# Altium PCB Copy of RT_SUPER_MK842.PCBdoc (part 3 of 3)
Units mil, origin at the board's own origin, x right, y up, seen from the top; angles counter-clockwise.
Board outline 1499.94 x 1499.94 mil, 4 copper layers (Top Layer, GND, PWR, Bottom Layer), stack 39.556 mil thick; 179 components, 119 nets, 506 pads, 207 vias.
Unrouted connection lines stored in the file: 7.
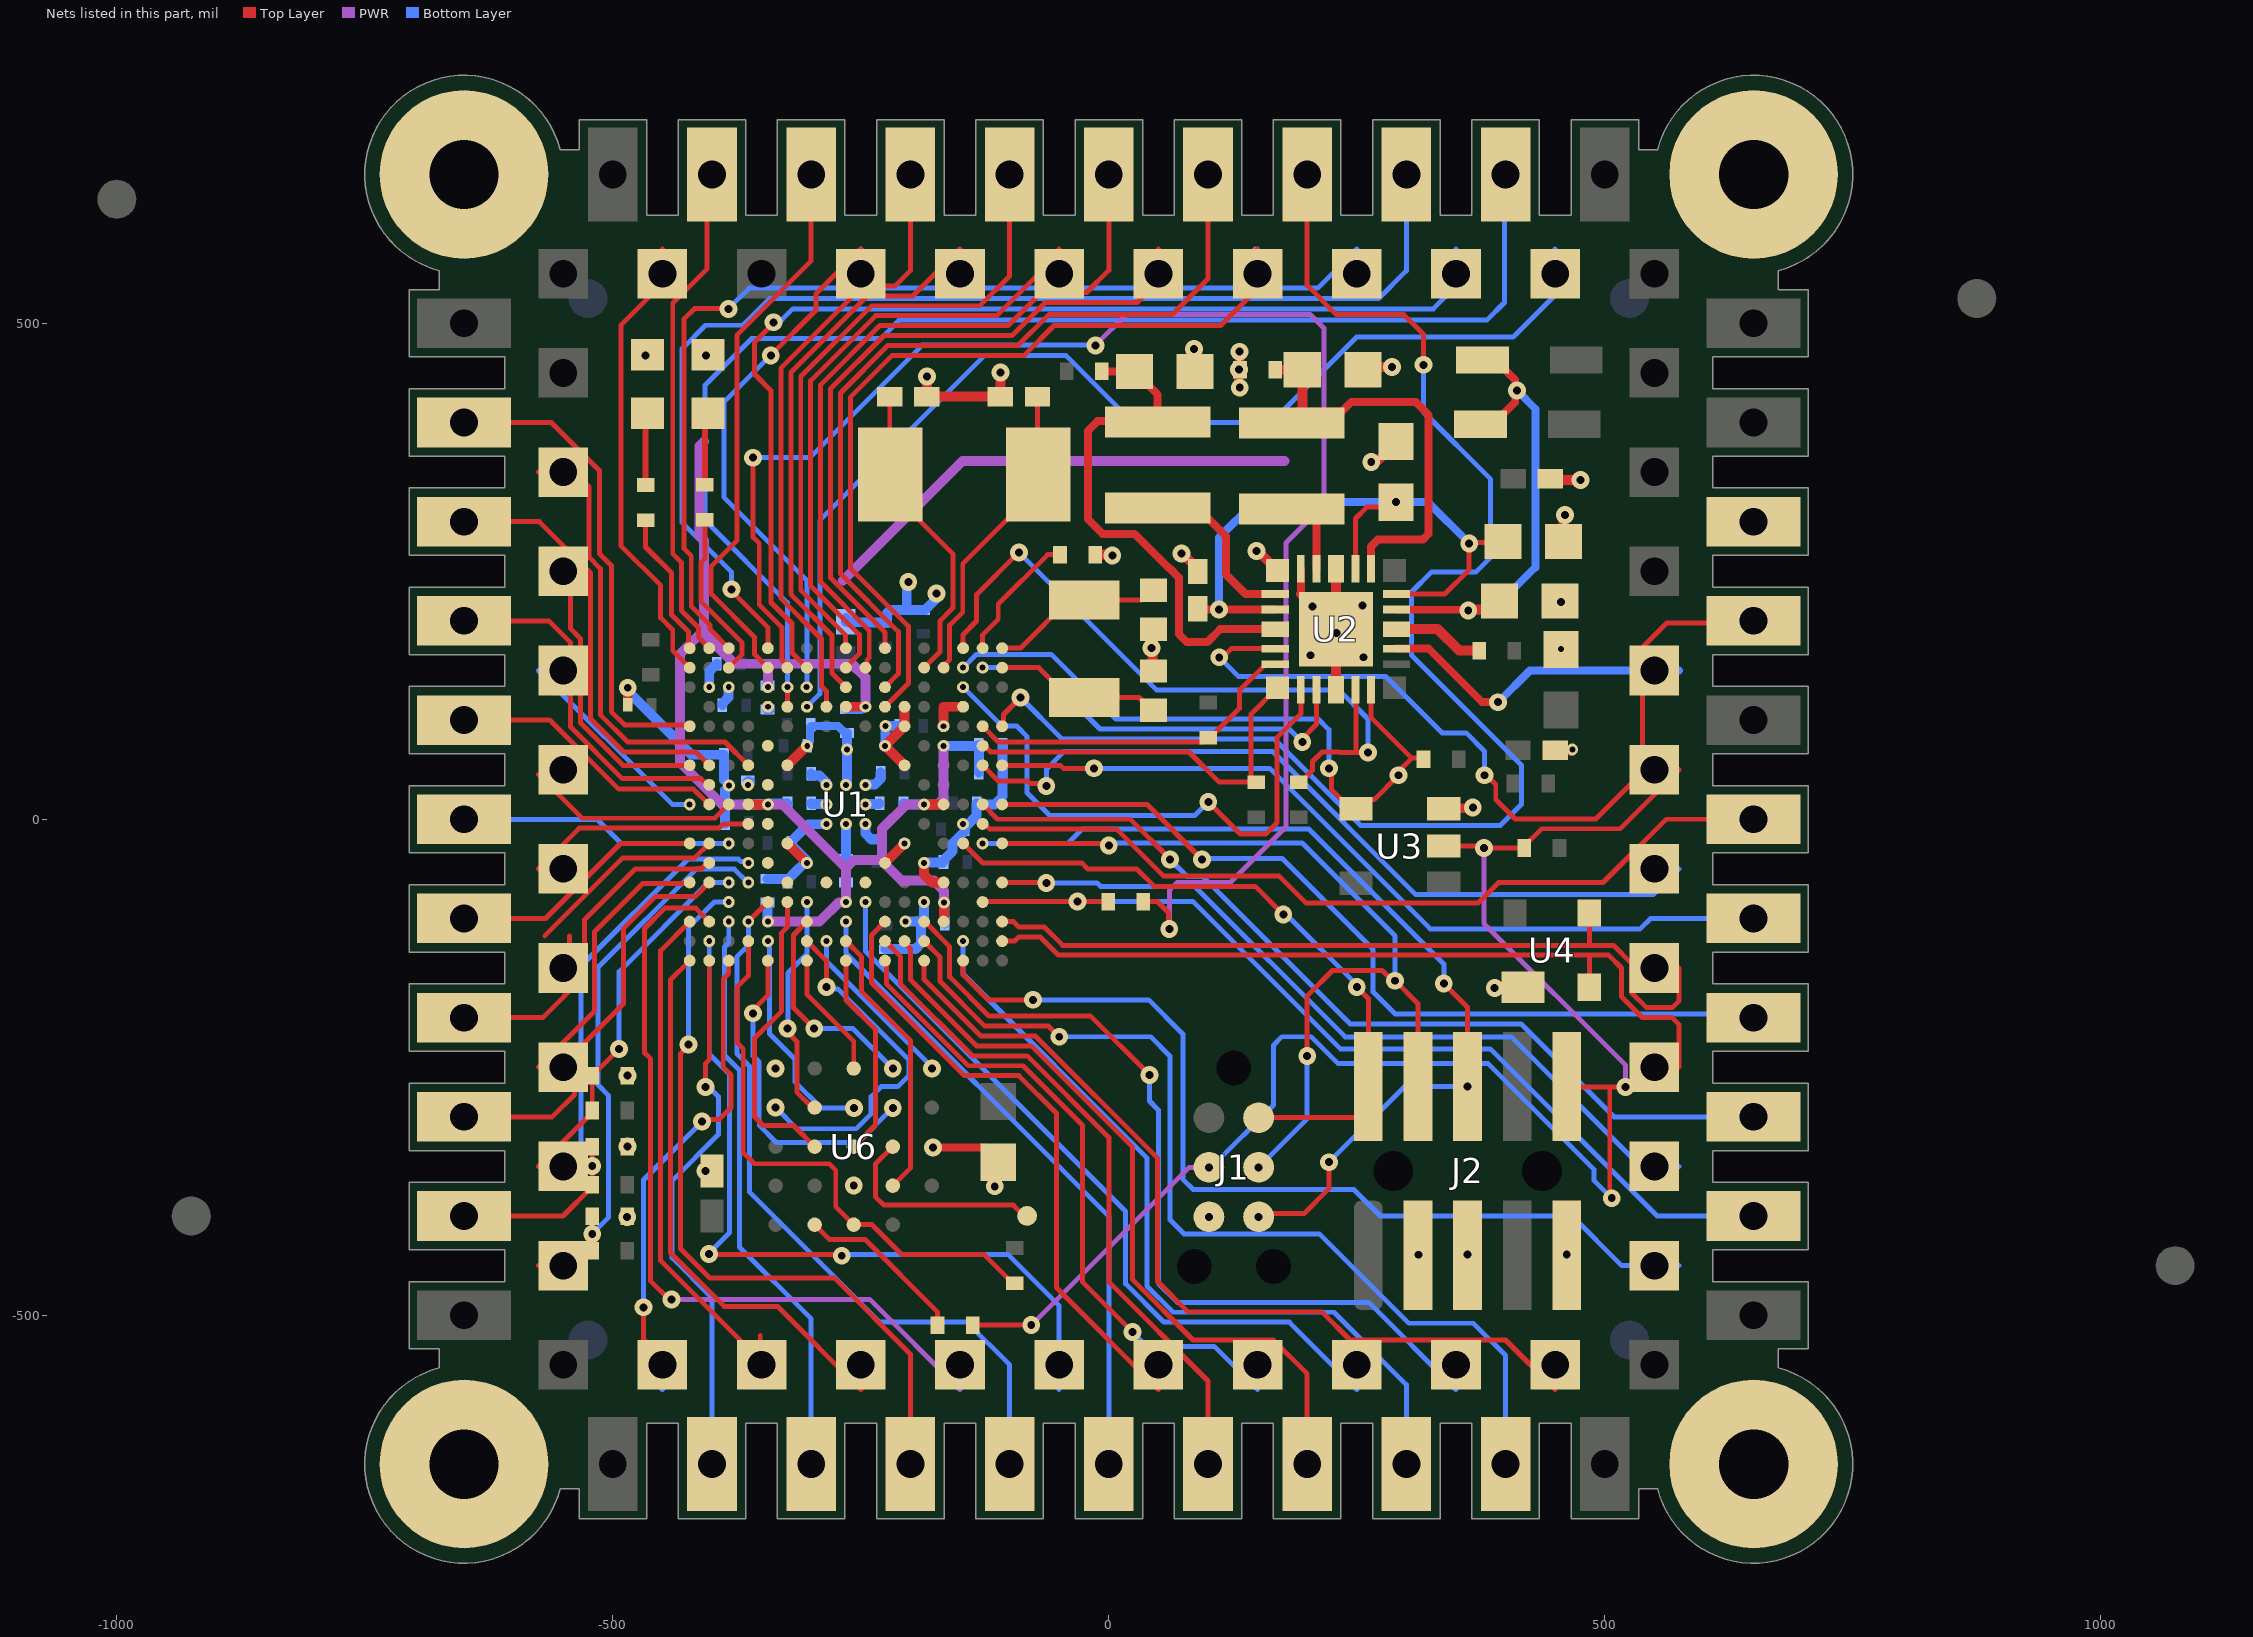
[diagram p4: the nets of this part, all layers, seen from the top]

## Via types
v1: diameter 18, hole 8, Top Layer to Bottom Layer, tented both sides, 124 vias
v2: diameter 12, hole 6, Top Layer to Bottom Layer, tented both sides, 83 vias

## Nets (pads, with @x,y where several pads share a name; then routed paths per layer and width w, separated by ;. In a path a pad name is that pad's centre, name@x,y a point inside that pad or via, vN(x,y) a via of type N, cw(c..) or ccw(c..) an arc to the next point about the centre after c; other vN are vias at no path point) (continued)
ADC0_3: T75.1 U1.A2 | length 534.2
  Top Layer w5: U1.A2@-402.8,172.48 -413.82,183.5 -413.82,193.36 -430.91,210.46 -430.91,258.96 -439.59,267.63 -439.59,520.41 -404.93,555.07 -404.93,670.07 T75.1@-400,675
ADC0_4: T73.1 U1.B5 | length 587.7
  Top Layer w5: U1.B5@-343.74,152.8 -357.24,166.3 -357.24,183.63 -400.91,227.3 -400.91,254.91 -375,280.82 -375,488 -300,563 T73.1@-300,675
ADC0_8: T2.1 U1.E1 | length 514.6
  Top Layer w5: T2.1@-672,400 -562.03,400 -513.38,351.35 -513.38,335.88 -513.38,267.66 -501.47,255.75 -501.47,108.51 -488.03,95.08 -423.82,95.08 U1.E1@-422.48,93.74
  Top Layer w6: T2.1@-675,400 T2.1@-672,400
ADC0_12: T76.1 U1.B1 | length 468.3
  Top Layer w5: -450,575 -450,540 -491.88,498.12 -491.88,275.86 -451.84,235.82 -451.84,203.1 -439.59,190.85 -439.59,169.9 U1.B1@-422.48,152.8
DM_MCU: T43.1 U1.T17 U4.2 | length 813.6
  Top Layer w5: U1.T17@-107.52,-122.8 -94.78,-122.8 -90.63,-118.65 -69.07,-118.65 -50.65,-137.07 482.78,-137.07 ; U4.2@484.37,-169.37 484.37,-138.67 482.78,-137.07 ; 575,-250 575,-207.1 567.9,-200 538,-200 516.79,-178.79 516.79,-150 503.86,-137.07 482.78,-137.07
DP_MCU: T45.1 U1.R17 U4.3 | length 804.1
  Top Layer w5: U1.R17@-107.52,-103.11 -96.18,-103.11 -90.63,-108.65 -64.93,-108.65 -46.51,-127.07 484.37,-127.07 ; U4.3@484.37,-94.56 484.37,-127.07 ; 575,-150 575,-182.9 567.9,-190 542.14,-190 526.79,-174.64 526.79,-145.14 508.72,-127.07 484.37,-127.07
FC0_CLK: T5.1 U1.G1 | length 304.2
  Top Layer w5: T5.1@-564.71,250 -542.5,227.79 -542.5,192.12 -532.5,182.12 -532.5,97.12 -489.75,54.37 U1.G1@-422.48,54.37 ; T5.1@-550,250 T5.1@-539.71,250
FC0_RXD: T3.1 U1.G4 | length 462
  Top Layer w5: T3.1@-575,350 -538.69,350 -523.88,335.18 -523.88,264.02 -512.5,252.64 -512.5,105.4 -484.97,77.87 -386.93,77.87 U1.G4@-363.43,54.37
FC0_SSEL0: T6.1 U1.H2 | length 390.5
  Top Layer w5: T6.1@-675,200 -564.53,200 -542.5,177.97 -542.5,92.98 -490.39,40.87 -410.87,40.87 -404.69,34.68 U1.H2@-402.8,34.68
FC0_SSEL1: T7.1 U1.J1 | length 208.4
  Bottom Layer w5: T7.1@-575,150 -440,15 v2(-422.48,15)
FC0_TXD: T4.1 U1.G2 | length 460.2
  Top Layer w5: T4.1@-675,300 -574,300 -522.5,248.5 -522.5,101.26 -489.11,67.87 -416.3,67.87 U1.G2@-402.8,54.37
FC1_CLK: T8.1 U1.J2 | length 307.4
  Top Layer w5: T8.1@-675,100 -563.66,100 -493.93,30.27 -418.66,30.27 -403.39,15 U1.J2@-402.8,15
FC1_RXD: T10.1 U1.L3 | length 302
  Bottom Layer w5: T10.1@-675,0 -674.52,-0.48 -515.48,-0.48 -491.59,-24.37 v2(-383.11,-24.37)
FC1_SSEL0: T9.1 U1.J3 | length 220.7
  Top Layer w5: T9.1@-575,45.31 -530.69,1 -397.11,1 U1.J3@-383.11,15 ; T9.1@-550,45.31 T9.1@-550,50
FC1_SSEL1: T12.1 U1.L1 | length 283.8
  Top Layer w5: T12.1@-675,-100 -567.83,-100 -492.2,-24.37 U1.L1@-422.48,-24.37
FC1_TXD: T11.1 U1.K4 | length 230.3
  Top Layer w5: T11.1@-575,-50 -534,-9 -392.97,-9 -388.65,-4.69 U1.K4@-363.43,-4.69
FC2_CLK: T62.1 U1.A3 | length 1058.5
  Top Layer w5: v1(-383.49,514.48) -383.93,514.92 -417.55,514.92 -428.37,504.1 -428.37,273.08 -420.91,265.63 -420.91,214.6 -402.02,195.71 -402.02,191.39 U1.A3@-383.11,172.48
  Bottom Layer w5: v1(-383.49,514.48) -362.5,535.47 210.47,535.47 250,575
FC2_SDA: T59.1 U1.D6 | length 1353.5
  Top Layer w5: U1.D6@-324.06,113.43 v2(-324.06,133.11)
  Bottom Layer w5: v2(-324.06,133.11) -324.06,218.4 -407.03,301.37 -407.03,437.61 -360.16,484.49 -229.94,484.49 -210.96,503.48 381.34,503.48 398.84,520.98 398.84,673.84 T59.1@400,675
FC2_SSEL0: T58.1 U1.D7 | length 1131.5
  Bottom Layer w5: v2(-304.37,113.43) -291.34,126.46 -291.34,301.34 -125,467.68 -43.24,467.68 24.68,399.76 163.48,399.76 249.72,486 407.53,486 450,528.47 450,575
FC2_SSEL1: T60.1 U1.B7 | length 1118.8
  Top Layer w5: v1(-337.96,500.99) -337.96,500.08 -357.24,480.8 -357.24,448.82 -340.53,432.11 -340.53,218.52 -319.3,197.29 -319.3,167.73 U1.B7@-304.37,152.8
  Bottom Layer w5: v1(-337.96,500.99) -335.48,503.48 -329.54,503.48 -318.54,514.48 327.2,514.48 350,537.28 350,575
FC2_WS: T61.1 U1.A5 | length 1222.5
  Top Layer w5: v1(-380.53,231.81) -380.53,230.23 -343.74,193.44 U1.A5@-343.74,172.48
  Bottom Layer w5: v1(-380.53,231.81) -380.53,249.39 -430.13,298.98 -430.13,474.48 -406.62,497.98 -368.92,497.98 -341.9,525 272.1,525 300,552.9 T61.1@300,675
FC3_CLK: T72.1 U1.C7 | length 545.1
  Top Layer w5: v1(-340.74,467.68) -295.1,513.32 -295.1,529.9 -250,575
  Bottom Layer w5: v1(-340.74,467.68) -388,420.42 -388,324.73 -304.37,241.1 -304.37,133.58 v2(-304.84,133.11) ; T72.1@-257.95,567.05 -250,575
FC3_SDA: T70.1 U1.C9 | length 562.4
  Top Layer w5: U1.C9@-265,133.11 -279,147.11 -279,185.27 -320.53,226.8 -320.53,450.41 -243.26,527.68 -197.32,527.68 -150,575
FC3_SSEL0: T68.1 U1.B9 | length 623.4
  Top Layer w5: U1.B9@-265,152.8 -265,153.39 -251.5,166.89 -251.5,186.06 -300.53,235.09 -300.53,442.13 -234.98,507.68 -112.84,507.68 -50,570.52 -50,575
FC3_SSEL1: T69.1 U1.A9 | length 672.6
  Top Layer w5: U1.A9@-265,172.48 -265.57,173.05 -265.57,185.98 -310.53,230.95 -310.53,446.27 -239.12,517.68 -129.92,517.68 -100,547.6 T69.1@-100,675
FC3_WS: T71.1 U1.D8 | length 653.4
  Top Layer w5: U1.D8@-284.68,113.43 -284.68,129.22 -289.61,134.14 -289.61,181.74 -330.53,222.66 -330.53,454.55 -247.41,537.68 -215.32,537.68 -200,553 T71.1@-200,675
FC4_CLK: T64.1 U1.D11 | length 844.3
  Top Layer w5: U1.D11@-225.63,113.43 -202.13,136.93 -202.13,194.64 -260.53,253.04 -260.53,425.56 -218.41,467.68 -85.18,467.68 -55.18,497.68 112.7,497.68 150,534.98 150,575
  PWR w5: 147.6,575 150,575
FC4_SDA: T65.1 U1.C11 | length 874.7
  Top Layer w5: U1.C11@-225.63,133.11 -212.13,146.61 -212.13,189.11 -270.53,247.51 -270.53,429.7 -222.55,477.68 -91.47,477.68 -60.4,508.74 63.75,508.74 100,544.99 T65.1@100,675
FC4_SSEL0: T66.1 U1.A11 | length 692.2
  Top Layer w5: U1.A11@-225.63,172.48 -225.63,188.47 -280.53,243.37 -280.53,433.84 -226.7,487.68 -97.34,487.68 -64.02,520.99 28.55,520.99 50,542.44 50,575
FC4_SSEL1: T63.1 U1.E17 | length 1485.5
  Top Layer w5: U1.E17@-107.52,93.74 -106.18,95.08 -106.18,105.61 v1(-89.07,122.71) ; T63.1@200,675 200,538.19 229.45,508.74 297.44,508.74 317.27,488.91 v1(317.27,458.13)
  Bottom Layer w5: v1(-89.07,122.71) -47.41,81.06 166.56,81.06 253.7,-6.08 394.93,-6.08 416.01,15 416.01,54.57 305.17,165.41 305.17,229.06 325.49,249.39 370.39,249.39 385,264 385,342.81 317.27,410.54 v1(317.27,458.13)
FC4_WS: T67.1 U1.B10 | length 767
  Top Layer w5: U1.B10@-245.31,152.8 -243.98,154.13 -243.98,160.27 -241.5,162.75 -241.5,190.2 -290.53,239.23 -290.53,437.98 -230.84,497.68 -101.48,497.68 -68.16,530.99 -22.42,530.99 0,553.42 T67.1@0,675
FC5_RXD: T42.1 U1.J16 | length 932.9
  Top Layer w5: U1.J16@-127.2,15 -112.2,0 21.61,0 61.75,-40.14 v1(61.75,-40.51)
  Bottom Layer w5: v1(61.75,-40.51) 79,-57.76 94.73,-57.76 243.3,-206.33 415.66,-206.33 509.33,-300 T42.1@675,-300
FC5_SCK: T47.1 U1.G16 | length 805.8
  Top Layer w5: U1.G16@-127.2,54.37 -111.46,38.62 -82,38.62 -79.32,35.95 -65.49,35.95 v1(-63,33.46)
  Bottom Layer w5: v1(-63,33.46) -62.88,33.58 -62.88,50.36 -44.8,68.44 165.03,68.44 309.48,-76 549,-76 575,-50
FC5_SSEL0: T44.1 U1.J17 | length 897.7
  Top Layer w5: U1.J17@-107.52,15 38.49,15 v1(94,-40.51)
  Bottom Layer w5: v1(94,-40.51) 95.15,-39.37 174.62,-39.37 266.5,-131.25 266.5,-174.21 288.62,-196.33 671.33,-196.33 T44.1@675,-200
FC5_TXD: T46.1 U1.G17 | length 855.2
  Top Layer w5: U1.G17@-107.52,54.37 -48.89,54.37 -45.89,51.37 v1(-15,51.37)
  Bottom Layer w5: v1(-15,51.37) 162.09,51.37 323.96,-110.5 535.74,-110.5 546.24,-100 T46.1@675,-100
FLEXSPI0A_D0: U1.T5 U6.D3 | length 224
  Top Layer w5: U6.D3@-257.13,-290.63 -257.13,-290.87 v1(-257,-291)
  Bottom Layer w5: v2(-343.74,-122.8) -342.4,-124.13 -342.4,-128.83 -342,-129.22 -342,-216.33 -316.13,-242.2 -316.13,-265.07 -290.2,-291 v1(-257,-291)
FLEXSPI0A_D1: U1.U5 U6.D2 | length 331.5
  Top Layer w5: v1(-358.5,-195.63) -358.5,-192.11 -343.74,-177.35 U1.U5@-343.74,-142.48 ; v1(-217.76,-291) U6.D2@-217.76,-290.63
  Bottom Layer w5: v1(-358.5,-195.63) -358.5,-238.51 -352.37,-244.65 -352.37,-308.59 -334.95,-326 -252.76,-326 v1(-217.76,-291)
FLEXSPI0A_D2: U1.P6 U6.C4 | length 303.5
  Top Layer w5: U1.P6@-324.06,-83.43 -324.06,-108.65 -329.8,-114.4 -329.8,-193.47 -357.24,-220.91 -357.24,-299.97 -348.55,-308.65 -317.84,-308.65 U6.C4@-296.5,-330
FLEXSPI0A_D3: U1.P7 U6.D4 | length 228.2
  Top Layer w5: v1(-324,-211) -324,-214.52 -314.44,-224.08 -314.44,-275.13 -298.94,-290.63 U6.D4@-296.5,-290.63
  Bottom Layer w5: v1(-324,-211) -323.43,-210.43 -323.43,-154.82 -304.37,-135.76 v2(-304.37,-83.43)
FLEXSPI0A_D4: U1.T7 U6.D5 | length 359.4
  Top Layer w5: U1.T7@-304.37,-122.8 -284.68,-142.48 v1(-284.68,-169)
  Bottom Layer w5: v1(-335.87,-290.63) -314.51,-311.98 -254.65,-311.98 -239.62,-296.95 -239.62,-279.68 -229.52,-269.58 -212.74,-269.58 -201.26,-258.09 -201.26,-242.99 -273.3,-170.95 -282.74,-170.95 v1(-284.68,-169)
FLEXSPI0A_D5: U1.U7 U6.E3 | length 128.3
  Top Layer w5: U1.U7@-304.37,-142.48 -304.37,-176.52 -257.13,-223.77 U6.E3@-257.13,-251.26
FLEXSPI0A_D6: U1.R7 U6.E2 | length 218
  Top Layer w5: U1.R7@-304.37,-103.11 -317.87,-116.61 -317.87,-190.13 v1(-297,-211)
  Bottom Layer w5: v1(-297,-211) -258.02,-211 v1(-217.76,-251.26)
FLEXSPI0A_D7: U1.T8 U6.E1 | length 174.2
  Top Layer w5: U1.T8@-284.68,-124.69 U1.T8@-284.68,-122.8
  Bottom Layer w5: v2(-284.56,-122.93) -284.56,-143.24 -178.39,-249.41 v1(-178.39,-251.26)
FLEXSPI0A_DQS: U1.U9 U6.C3 | length 208.9
  Top Layer w5: U1.U9@-265,-142.48 -265,-182.15 -235.31,-211.83 -235.31,-308.19 U6.C3@-257.13,-330
FLEXSPI0A_SCK: U1.T9 U6.B2 | length 281.1
  Top Layer w5: U1.T9@-265,-122.8 -249.13,-138.67 -249.13,-173.8 -199.76,-223.17 -199.76,-351.37 U6.B2@-217.76,-369.37
FLEXSPI0A_SS0_N: R9.1 U1.T4 U6.A3 | length 570.5
  Top Layer w5: U1.T4@-363.43,-122.8 -363.43,-157.79 -375,-169.37 -375,-224.95 -368.5,-231.45 -368.5,-336.03 -357.24,-347.3 -281.95,-347.3 -275.24,-354.01 -275.24,-390.62 U6.A3@-257.13,-408.74 -238.66,-408.74 -208.4,-439 -125.41,-439 -96.69,-467.72 R9.1@-94.72,-467.72
FLEXSPI0B_CLK: T20.1 U1.U3 | length 493.4
  Top Layer w5: T20.1@-469,-549.48 v1(-469,-492) ; -469,-524.48 -450,-543.48 T20.1@-450,-550 ; v1(-410.12,-304.84) -407.8,-302.52 -392.66,-302.52 -380.89,-290.75 -380.89,-257.7 -388.65,-249.94 -388.65,-161.09 -383.11,-155.55 U1.U3@-383.11,-142.48
  Bottom Layer w5: v1(-469,-492) -469,-363.72 v1(-410.12,-304.84) ; T20.1@-451.5,-573.5 T20.1@-450,-575
GND: C1.1 C2.2 C3.1 C4.1 C5.2 C6.1 C7.1 C8.2 C9.1 C10.1 C11.1 C12.1 C13.1 C14.1 C15.1 C16.1 C17.1 C18.1 C19.1 C20.1 C21.1 C22.1 C23.1 C24.1 C25.1 C26.1 C27.1 C28.1 C29.1 C30.1 C31.1 C32.1 C33.1 C34.1 C35.1 C36.1 C37.1 C38.1 C39.1 C40.1 C41.1 C42.2 C43.2 C44.2 C45.2 D3.C D4.C J1.5 J2.3 J2.5 J2.9 pad.2 R1.1 R15.1 R17.1 R18.1 T54.1 U1.C2 U1.C3 U1.D5 U1.D12 U1.D15 U1.E12 U1.E14 U1.F7 U1.F11 U1.G6 U1.G12 U1.H8 U1.H9 U1.H10 U1.J8 U1.J10 U1.K8 U1.K9 U1.K10 U1.L6 U1.L12 U1.M7 U1.M11 U1.M13 U1.N14 U1.P13 U2.9 U2.21 U2.23 U2.24 U2.25 U3.3 U4.1 U6.B3 U6.C1 U6.E5 | length 2098.9
  Top Layer w8: U6.C1@-178.39,-330 v1(-177.36,-331.03) -125.17,-331.03 -111.46,-344.74 C42.2@-111.46,-345.73 -113.58,-347.85 -113.58,-368.52 -115,-369.94 v1(-115,-370) ; U2.25@193.61,226.98 U2.23@193.61,252.57
  Top Layer w10: v1(-485.5,-400.85) -485.28,-400.63 R18.1@-485.28,-400 ; C6.1@-484.96,115.39 v1(-484.97,132.56) ; v1(-467,467.68) -466.33,468.35 D3.C@-465.07,468.35 ; v1(-406.05,467.68) -405.38,468.35 D4.C@-404.13,468.35 ; U1.G6@-324.06,54.37 U1.F7@-304.43,74 ; U1.L6@-323.51,-24.37 U1.L6@-324.06,-24.37 v2(-304.37,-44.06) ; U1.F7@-304.37,74.06 -304.06,74.06 v2(-304,74) ; U1.M11@-225.63,-44.06 v2(-205.94,-24.37) ; U1.G12@-205.94,54.37 v2(-225.63,74.06) U1.E12@-205.94,93.74 U1.E12@-205.94,93.74 -206,113.37 U1.D12@-205.94,113.43 ; v2(-186.26,-44.06) -186.26,-55.87 -178.39,-63.74 U1.N14@-166.57,-63.74 ; v1(-183.43,446.27) C19.1@-183.43,426.02 C11.1@-109.33,426.02 v1(-109.33,450.54) ; v2(-166.57,93.74) -166.57,113.43 U1.D15@-146.89,113.43 ; R1.1@-13.77,266.78 2.65,266.78 v1(3.51,265.92) ; C44.2@45,149.45 44.02,150.43 44.02,171.5 v1(43.03,172.48) 43.03,189.67 C45.2@45,191.64 ; v1(73.4,267.76) 74.42,267.76 89.47,252.72 C8.2@89.47,249.76 ; v1(86,473.9) 86,452.56 C9.1@87.04,451.53 C9.1@88.02,450.54 ; v1(148.74,270.26) 150.33,270.26 U2.24@169.92,250.67 ; U2.25@193.61,226.98 U2.25@228.98,191.61 ; U2.9@228.98,130.59 U2.25@228.98,188.06 ; U2.21@228.98,252.64 U2.25@228.98,191.61 ; v1(229.45,187.58) U2.25@228.98,188.06 ; C7.1@256.09,453.11 259.04,456.06 v1(285.62,456.06) ; v1(264.54,360.17) 266.07,361.7 271.54,361.7 289.48,379.64 C5.2@289.48,380.62 ; J2.3@311.67,-439.58 311.67,-439.33 v1(312,-439) ; U3.3@337.72,10.42 338.43,11.13 366.26,11.13 v1(366.96,11.83) ; J2.5@361.67,-439.58 v1(361.67,-438.91) ; v1(389,-170) 390.07,-171.07 415.68,-171.07 U4.1@417.37,-169.37 ; C4.1@449.11,343.11 450.11,342.11 v1(475.52,342.11) ; C3.1@449.93,69.35 C3.1@453.86,69.35 ; C3.1@449.93,74.19 453.86,70.26 C3.1@453.86,69.35 ; C1.1@454.99,220.11 456,219.1 v1(456,219) ; C18.1@456,171.04 v2(456,171.53) ; C18.1@456.24,171.28 C18.1@456.98,172.02 ; C2.2@458.4,280.11 458.4,305.31 v1(459.77,306.68) ; J2.9@461.67,-439.58 v1(461.67,-438.91) ; v2(467.22,70.12) 466.46,69.35 C3.1@453.86,69.35 ; U2.25@228.98,188.06 U2.25@228.98,191.61
  Bottom Layer w5: C38.1@-395.11,154.76 C38.1@-395.11,154.92
  Bottom Layer w8: v2(-304,74) -304,75.97 -301.31,78.66 -301.31,93.2 -300.39,94.12 -273.09,94.12 -265.97,87 C34.1@-264,87
  Bottom Layer w10: v1(-484.97,132.56) -488.22,132.56 -420.66,65 C16.1@-388,65 -388,39.54 ; v2(-402.8,133.11) -402.8,148.91 -396.86,154.84 -395.19,154.84 -395.11,154.92 C38.1@-395.11,156.73 ; C39.1@-389.59,115 -389.59,116.81 -383.49,122.91 -383.49,132.73 v2(-383.11,133.11) ; C40.1@-387.08,-4.14 -387,-4.06 C40.1@-387,-3.84 -387,29.45 -383,33.46 v2(-383,34) ; C30.1@-363.92,38 C30.1@-361.95,38 ; C33.1@-344.01,110.71 C33.1@-342.2,110.71 ; C32.1@-342.19,-60 C32.1@-344,-60 C32.1@-344,-60 -325.11,-60.08 C24.1@-324,-61.19 ; C24.1@-324,-63 C24.1@-324,-61.19 ; C29.1@-300,16 -299.5,15.5 -285.18,15.5 v2(-284.68,15) ; C21.1@-300,46 -300,44.19 -299.92,44.11 -291.62,44.11 -285.07,37.56 -285.07,35.07 v2(-284.68,34.68) ; v2(-284.68,-4.69) -285.07,-5.07 -302.88,-5.07 -320,-22.19 C20.1@-320,-24 -320,-25.81 -304.75,-41.06 -304.75,-43.67 v2(-304.37,-44.06) -304.75,-44.44 -307.39,-44.44 -316.13,-53.18 -316.13,-53.32 C24.1@-324,-61.19 ; C27.1@-265,-39.74 v2(-265,-4.69) ; v2(-265,34.68) -265,35.23 -264.02,36.21 v2(-264.02,70.12) C34.1@-264,87 ; C10.1@-265,199.06 -265,202.99 -260.58,198.57 -243,198.57 -242.68,198.26 -226.05,198.26 -225.97,198.18 C36.1@-225.43,198.18 ; v2(-245.31,-4.69) -245.31,-14.39 -239.46,-20.24 C15.1@-232.52,-20.24 ; v2(-245.31,15) -244.81,15.5 -231.5,15.5 C28.1@-231,16 ; v2(-245.31,34.68) -245.07,34.93 -235.86,34.93 -230,40.78 C22.1@-230,47 ; v2@-226.05,75.01 -225.63,74.6 v2(-225.63,74.06) -225.31,74.37 -225.31,93.68 v2(-225,94) C41.1@-211,94 ; C12.1@-225,-131 -195.07,-131 -189.21,-125.14 -189.21,-107.08 -189.4,-106.89 C31.1@-189.4,-105.08 C31.1@-189.4,-103.27 ; C36.1@-223.54,198.26 -223.54,208.04 -220.53,211.06 C37.1@-187,211.06 -185.19,211.06 -175.28,220.96 -175.28,226.07 v1(-173.75,227.6) ; v2(-204.96,-103.11) -195.26,-103.11 -195.18,-103.19 -189.48,-103.19 C31.1@-189.4,-103.27 ; -203.66,211.06 -203.66,237.7 v1(-202.13,239.23) ; v2(-186.26,-83.43) -186.26,-100.13 C31.1@-189.4,-103.27 ; v2(-186.26,-44.06) -185.77,-43.56 -167.26,-43.56 C14.1@-166.76,-43.07 -166.76,-41.26 -157.69,-32.18 -157.69,-24.52 -154.2,-21.03 -154.2,-20.89 -145.12,-11.81 C23.1@-145.12,-10 C23.1@-145.12,-8.19 ; v2(-146.89,-4.69) -146.89,-6.42 C23.1@-145.12,-8.19 ; C25.1@-133.12,16 C25.1@-133.2,15.16 ; C26.1@-106.61,75 C26.1@-107,75 C35.1@-107,47 -107,23 -115,15 -133.04,15 C25.1@-133.2,15.16 ; C23.1@-145.12,-8.19 -133.2,3.73 C25.1@-133.2,15.16
  other v1: 101,-400.85 -257.13,-369.37 -406.59,-354.58 -485.28,-330 -485.28,-258.5 -335.87,-251.26 256.66,163.34 203.51,165.31 205.48,214.52 255.68,215.51
  other v2: -363.6,34.63 -343.74,113.43
HS_SPI_MISO: T14.1 U1.M2 | length 369.9
  Top Layer w5: T14.1@-675,-200 -570.64,-200 -528.68,-158.04 -528.68,-101.58 -477.25,-50.15 -410.79,-50.15 -404.69,-44.06 U1.M2@-402.8,-44.06
HS_SPI_MOSI: T15.1 U1.N1 | length 276.6
  Top Layer w5: T15.1@-575,-250 -518.5,-193.5 -518.5,-113.46 -470.03,-64.99 -423.73,-64.99 U1.N1@-422.48,-63.74
HS_SPI_SCK: T13.1 U1.L2 | length 239.5
  Top Layer w5: -568.6,-117.5 -490.09,-38.98 -417.41,-38.98 U1.L2@-402.8,-24.37 ; T13.1@-550,-150 -543.6,-143.6 -543.6,-117.5
HS_SPI_SSEL0: T16.1 U1.N2 | length 439.2
  Top Layer w5: T16.1@-675,-300 -561.1,-300 -538.69,-277.59 -538.69,-235.44 -489,-185.75 -489,-109.95 -457.05,-78 -417.06,-78 U1.N2@-402.8,-63.74
I3C0_PUR: R16.1 U1.B6 | length 1615.8
  Top Layer w5: v1(-358.5,364.49) -358.5,284.24 -352.37,278.11 -352.37,216.21 -329.3,193.15 -329.3,159.94 -324.06,154.69 U1.B6@-324.06,152.8 ; R16.1@34.72,-83 49.11,-83 60.18,-94.07 60.18,-109.77 v1(60.98,-110.57)
  PWR w5: v1(-13.51,477.68) 17.81,509 203,509 217,495 217,317 178.57,278.57 178.57,-7.58 122.4,-63.74 68.95,-63.74 60.98,-71.71 v1(60.98,-110.57)
  Bottom Layer w5: v1(-358.5,364.49) -301.62,364.49 -188.14,477.98 -13.81,477.98 v1(-13.51,477.68)
I3C0_SCL: T41.1 U1.N17 | length 799.9
  Top Layer w5: U1.N17@-107.52,-63.74 v1@-63.98,-63.74
  Bottom Layer w5: v1(-63,-64.32) -11.68,-64.32 -8.24,-67.76 86.68,-67.76 238.24,-219.32 405.56,-219.32 536.25,-350 575,-350
I3C0_SDA: R16.2 T40.1 U1.P16 | length 966.4
  Top Layer w5: U1.P16@-127.2,-83.43 -126.78,-83 v1(-31.49,-83) R16.2@-0.72,-83 R16.2@-0.72,-84.97
  Bottom Layer w5: v1(-31.49,-83) 84.99,-83 233.47,-231.49 384.41,-231.49 552.92,-400 T40.1@675,-400
ISP0: R12.1 R15.2 T17.1 U1.N3 | length 379
  Top Layer w5: T17.1@-575,-349.86 -520.72,-295.58 R12.1@-520.72,-293.61 R15.2@-520.72,-258.5 -520.72,-256.54 -516.33,-252.15 -514.32,-252.15 v1(-493.66,-231.49) ; T17.1@-550,-350 T17.1@-550,-349.86
  Bottom Layer w5: v1(-493.66,-231.49) -493.66,-153.66 -403.74,-63.74 v2(-383.11,-63.74)
ISP1: R13.1 R17.2 T18.1 U1.M4 | length 629.9
  Top Layer w5: T18.1@-675,-400 -550.23,-400 -520.72,-370.49 R13.1@-520.72,-368.52 v1(-520.72,-349.66) R17.2@-520.72,-330
  Bottom Layer w5: v1(-520.72,-349.66) -523.68,-349.66 -532,-341.34 -532,-148 -424.24,-40.24 -373.38,-40.24 -370.9,-42.72 -364.76,-42.72 v2(-363.43,-44.06)
ISP2: R14.1 R18.2 T19.1 U1.N4 | length 574.8
  Top Layer w5: T19.1@-575,-450 -533.75,-450 -520.72,-436.97 R14.1@-520.72,-435 v1(-520.72,-417.93) R18.2@-520.72,-400
  Bottom Layer w5: v1(-520.72,-417.93) -504.15,-401.36 -504.15,-278.66 -515,-267.81 -515,-149.31 -415.93,-50.24 -377.52,-50.24 -364.02,-63.74 v2(-363.43,-63.74)
MCLK: T48.1 U1.K16 | length 870.3
  Top Layer w5: U1.K16@-127.2,-4.69 -125.31,-4.69 -120,-10 7.9,-10 54.91,-57.01 171.35,-57.01 198.9,-84.56 372.22,-84.56 393.04,-63.74 498.26,-63.74 562,0 T48.1@675,0
NetC1_2: C1.2 D1.2 D2.2 U2.16 | length 488.8
  Top Layer w8: U2.16@290.09,211.21 v1@361.67,211.21 ; D2.2@374.63,398.21 387.43,398.21 409.75,420.54 409.75,430.2 v1(411.67,432.11) 409.75,434.03 409.75,442.8 389.55,463 D1.2@376.76,463
  Top Layer w10: v1@361.67,211.21 v1(362.33,210.55) ; v1@362.33,211.3 385.15,211.3 C1.2@393.96,220.11
  Bottom Layer w8: v1(362.33,210.55) 386.55,210.55 430,254 430,413.78 v1(411.67,432.11)
NetC2_1: C2.1 C5.1 C8.1 U2.2 U2.17 U2.20 | length 677.6
  Top Layer w5: U2.20@248.66,252.64 248.66,303.25 259.96,314.55 284.43,314.55 v1(289.48,319.6) ; U2.17@290,227.05 338.8,227.05 363.31,251.56 v1(363.31,278.14) ; v1@364.3,279.12 396.38,279.12 C2.1@397.37,280.11
  Top Layer w8: C8.1@89.47,212.36 90.53,211.3 v1(111,211.3) U2.2@167.95,211.3
  Bottom Layer w8: v1(111,211.3) 111,283.98 146.62,319.6 321.85,319.6 v1(363.31,278.14)
NetC7_2: C7.2 L2.2 R7.1 U2.19 | length 444.4
  Top Layer w5: C7.2@179.99,453.11 C7.2@195.07,453.11
  Top Layer w8: L2.2@185.32,399.48 L2.2@184.48,399.48 196.22,411.23 235.16,411.23 244.47,420.54 309.49,420.54 322.45,407.58 322.45,287.71 316.81,282.07 271.46,282.07 264.41,275.03 U2.19@264.41,252.64
  Top Layer w10: R7.1@167.72,453.11 C7.2@179.99,453.11 ; L2.2@179.99,398.91 L2.2@179.99,403.48 ; L2.2@184.48,403.48 195.07,414.07 C7.2@195.07,453.11
NetC9_2: C9.2 L3.2 R10.1 U2.3 | length 534.5
  Top Layer w8: R10.1@-6.95,451.53 27,451.53 40.71,437.81 40.71,436.83 49.2,428.34 49.2,403.48 47.14,401.42 -11.26,401.42 -21.09,391.59 -21.09,302.53 -6.26,287.71 25.99,287.71 60.98,252.72 61.61,252.72 70.63,243.71 70.63,186.69 78.55,178.76 99.39,178.76 112.24,191.61 U2.3@167.95,191.61
NetC11_2: C11.2 U1.B14 X2.2 | length 316.7
  Top Layer w5: U1.B14@-166.57,152.8 -166.57,154.69 -160.39,160.87 -160.39,195.61 -147.25,208.75 -147.25,257.51 -101.96,302.8 -100.93,302.8 -70.93,332.8 X2.2@-70.93,347.54 -71.93,348.55 C11.2@-71.93,426.02 ; C11.2@-68,426.02 C11.2@-66.03,427.99
NetC19_2: C19.2 U1.B13 X2.1 | length 311.6
  Top Layer w5: C19.2@-220.83,426.02 -220.83,347.84 -190.53,317.54 -190.53,300.92 -157.25,267.63 -157.25,212.89 -170.39,199.75 -170.39,168.67 U1.B13@-186.26,152.8
NetC44_1: C44.1 U1.B17 X1.2 | length 170.2
  Top Layer w5: U1.B17@-107.52,152.8 -70.49,152.8 -40.41,122.71 X1.2@-24.66,122.71 30.4,122.71 43.03,110.08 C44.1@45,110.08
NetC45_1: C45.1 U1.A17 X1.1 | length 176.8
  Top Layer w5: U1.A17@-107.52,172.48 -89.07,172.48 -40.41,221.14 X1.1@-24.66,221.14 33.16,221.14 43.03,231.01 C45.1@45,231.01
NetD3_A: D3.A R19.1 | length 73.1
  Top Layer w6: R19.1@-467,337 -467,407.36 D3.A@-465.07,409.29
NetD4_A: D4.A R20.1 | length 73.3
  Top Layer w6: R20.1@-407.27,337.32 -407.27,406.16 D4.A@-404.13,409.29
NetL2_1: L2.1 U2.22 | length 82.2
  Top Layer w8: L2.1@184.48,316.87 197.54,316.87 209.29,305.12 U2.22@209.29,252.64
NetL3_1: L3.1 U2.1 | length 178.6
  Top Layer w8: L3.1@49.2,316.87 86.6,316.87 118.09,285.38 118.09,246.78 137.83,227.05 U2.1@167.95,227.05
NetR1_2: R1.2 U1.A16 | length 133.9
  Top Layer w5: U1.A16@-127.2,172.48 -127.2,185.94 -111.46,201.69 -111.46,216.96 -61.64,266.78 R1.2@-49.2,266.78
NetR11_2: R11.2 U6.A4 | length 173.6
  Top Layer w5: U6.A4@-296.5,-408.74 -281.71,-423.52 -245.82,-423.52 -172.77,-496.57 -172.77,-509.95 R11.2@-172.72,-510
NetR22_1: R22.1 U2.15 | length 92.2
  Top Layer w10: U2.15@290,191.61 331.62,191.61 353.23,170 R22.1@373.28,170
NetTP1_1: TP1.1 U6.C2 | length 218.7
  Top Layer w5: U6.C2@-217.76,-330 -235.31,-347.56 -235.31,-380.38 -226.7,-389 -96.24,-389 -85.39,-399.85 TP1.1@-82.35,-399.85
PDM_CLK01: T22.1 U1.R1 | length 526.2
  Top Layer w5: U1.R1@-422.48,-103.11 -451.84,-132.47 -451.84,-444.94 T22.1@-351.35,-545.43 ; -351.35,-520.43 -351.35,-548.65 T22.1@-350,-550
PDM_CLK23: T24.1 U1.U1 | length 551.5
  Top Layer w5: U1.U1@-422.48,-142.48 -441.84,-161.84 -441.84,-436.97 -387.81,-491 -334,-491 T24.1@-250,-575
PDM_CLK45: T26.1 U1.R2 | length 794.5
  Top Layer w5: v1(-441,-484) -443.42,-484 -461.84,-465.58 -461.84,-241.6 -468,-235.44 -468,-110.13 -447.48,-89.61 -416.3,-89.61 U1.R2@-402.8,-103.11
  PWR w5: v1(-441,-484) -241,-484 T26.1@-150,-575
PDM_CLK67: T28.1 U1.T2 | length 792.7
  Top Layer w5: v1(-403.06,-438.28) -402.34,-439 -270.23,-439 v1(-269.21,-440.02)
  Bottom Layer w5: v1(-403.06,-438.28) -403.06,-437.44 -382.37,-416.75 -382.37,-257.07 -402.8,-236.64 v2(-402.8,-122.8) ; v1(-269.21,-440.02) -268.1,-438.91 -101.5,-438.91 -50,-490.41 T28.1@-50,-575
PDM_DATA01: T21.1 U1.U2 | length 577.4
  Top Layer w5: v1(-406.59,-270) -406.59,-246.39 -402.8,-242.6 U1.U2@-402.8,-142.48
  Bottom Layer w5: v1(-406.59,-270) -403.07,-270 -393.62,-279.45 -393.62,-317.85 -440.13,-364.35 -440.13,-442.11 -400,-482.23 T21.1@-400,-675
PDM_DATA23: T23.1 U1.R3 | length 609.9
  Bottom Layer w5: v2(-383.11,-103.11) -383.11,-124.4 -387.46,-128.75 -387.46,-237.84 -372.37,-252.93 -372.37,-431.32 -300,-503.68 T23.1@-300,-675
PDM_DATA45: T25.1 U1.P3 | length 790
  Top Layer w5: v1(-423.82,-227.01) -423.82,-228.42 -431.84,-236.44 -431.84,-432.83 -402.05,-462.62 -276.38,-462.62 -200,-539 T25.1@-200,-675
  Bottom Layer w5: v1(-423.82,-227.01) -423.82,-109.53 -397.71,-83.43 v2(-383.11,-83.43)
PDM_DATA67: T27.1 U1.P5 | length 769.9
  Top Layer w5: v2(-363.43,-103.11) U1.P5@-343.74,-83.43
  Bottom Layer w5: v2(-363.43,-103.11) -363.43,-127.2 -375,-138.78 -375,-236.15 -362.37,-248.79 -362.37,-375.56 -230.93,-507 -143.04,-507 -100,-550.04 T27.1@-100,-675
PIO0_19: R19.2 U1.A1 | length 147.5
  Top Layer w5: R19.2@-467,301.57 -467,274.43 -440.91,248.34 -440.91,206.31 -423.82,189.22 -423.82,173.82 U1.A1@-422.48,172.48
PIO2_4: T37.1 U1.T13 | length 1004.7
  Top Layer w5: U1.T13@-186.26,-122.8 -170.39,-138.67 -170.39,-163.05 -124.93,-208.5 -60.73,-208.5 v1(-49.96,-219.28)
  Bottom Layer w5: v1(-49.96,-219.28) 42.27,-219.28 61.75,-238.76 61.75,-403.88 75.8,-417.93 212.27,-417.93 302.43,-508.09 367.5,-508.09 400,-540.59 T37.1@400,-675
PIO2_5: T38.1 U1.U13 | length 899.2
  Top Layer w5: U1.U13@-186.26,-142.48 -186.26,-161.32 -129.08,-218.5 -74.06,-218.5 49.2,-341.77 49.2,-465.96 79.72,-496.47 214.7,-496.47 243.16,-524.94 399.94,-524.94 T38.1@450,-575
PIO2_6: T39.1 U1.U15 | length 943.4
  Top Layer w5: U1.U15@-146.89,-142.48 -146.89,-156.83 -121.71,-182 v1(-76.38,-182)
  Bottom Layer w5: v1(-76.38,-182) 40.13,-182 74.62,-216.49 74.62,-362.88 84.99,-373.24 247.09,-373.24 273.85,-400 467.22,-400 517.22,-450 575,-450
PMIC_INTB: R2.1 U1.A15 U2.10 | length 726.7
  Top Layer w5: U1.A15@-146.89,172.48 -146.89,186.26 -133.3,199.85 -133.3,226.4 v1(-90.63,269.06) ; R2.1@191.38,37.45 193.35,37.45 205.38,49.48 205.38,58.2 215.04,67.87 231.78,67.87 232.4,67.25 249.14,67.25 ; U2.10@248.66,130.59 249.14,130.11 249.14,67.25 ; v1(261.31,67.25) 249.14,67.25
  Bottom Layer w5: v1(-90.63,269.06) 47.95,130.48 231.89,130.48 261.31,101.06 v1(261.31,67.25)
PMIC_MODE0: U1.C15 U2.7 | length 571.3
  Top Layer w5: v1(100.31,17.41) 132.7,-14.97 158.11,-14.97 169.38,-3.71 169.38,67.18 169.38,82.02 193.54,106.19 U2.7@193.54,130.59
  Bottom Layer w5: v2@-147.01,133.23 v2(-146.89,133.11) -107.9,94.12 -93.11,94.12 -82.63,83.64 -82.63,26.99 -59.37,3.73 86.64,3.73 v1(100.31,17.41)
PMIC_MODE1: U1.B16 U2.8 | length 411.9
  Top Layer w5: v1(195.07,77.87) 195.07,81.29 209.29,95.51 U2.8@209.29,130.59
  Bottom Layer w5: v2(-127.2,152.8) -70.64,152.8 -8.9,91.06 181.88,91.06 v1(195.07,77.87)
PMIC_ON: T52.1 U2.4 | length 870.8
  Top Layer w5: v1(111.34,163.26) 114.86,163.26 123.52,171.93 U2.4@167.95,171.93 ; v1(378.8,44.34) 380.75,44.34 390.07,35.02 390.07,19.87 409.52,0.42 491.19,0.42 538,47.23 538,173.23 562.77,198 673,198 T52.1@675,200
  Bottom Layer w5: v1(111.34,163.26) 130.6,144 278.97,144 335.89,87.08 360.17,87.08 378.8,68.44 v1(378.8,44.34)
PMIC_RESETN: R5.1 U1.B15 U2.11 U3.4 | length 674.2
  Top Layer w5: v1(221.88,51.37) 224.37,48.88 224.37,30.27 244.22,10.42 U3.4@249.14,10.42 ; U3.4@249.93,17.41 252.25,19.73 267.49,19.73 v1(292.1,44.34) ; U2.11@264.41,130.59 264.41,102.49 305.3,61.6 ; v1@292.45,44.34 292.45,48.2 296.73,52.49 296.73,53.03 305.3,61.6 ; R5.1@317.25,60.41 316.06,61.6 305.3,61.6
  Bottom Layer w5: v2(-146.89,152.8) -133.39,166.3 -58.09,166.3 7.15,101.06 211.11,101.06 221.88,90.29 v1(221.88,51.37)
PMIC_SCL: R3.1 U1.E16 U2.5 | length 343.9
  Top Layer w5: U1.E16@-127.2,93.74 -111.33,77.87 91.03,77.87 ; 91.05,77.89 95.93,77.89 R3.1@100.31,82.28 ; R3.1@101.5,81.5 131.67,111.67 131.67,129.74 156.67,154.74 166.52,154.74 U2.5@167.95,156.18
PMIC_SDA: R4.1 U1.F16 U2.6 | length 399
  Top Layer w5: U1.F16@-127.2,74.06 -125.31,74.06 -119.13,67.87 80.91,67.87 111.34,37.45 R4.1@147.85,37.45 ; R4.1@148.74,37.45 R4.1@147.85,37.45 ; U2.6@169.92,132.56 143.46,106.1 143.46,41.84 R4.1@147.85,37.45
RED_LED: R20.2 U1.B3 | length 173.3
  Top Layer w5: R20.2@-407.27,301.88 -407.27,262.69 -410.91,259.05 -410.91,219.37 -369.61,178.07 -369.61,166.3 U1.B3@-383.11,152.8
RST_3V3: J1.3 J2.10 R8.1 R11.1 T49.1 U3.2 | length 1618.6
  Top Layer w5: R11.1@-137.28,-510 v1(-78.21,-510) ; U3.2@337.72,-26.98 376.11,-26.98 v1(378.08,-28.95) R8.1@418.95,-28.95 418.95,-26.98 436.35,-9.58 515.42,-9.58 575,50 ; J2.10@461.67,-269.58 462.09,-270 505,-270 ; v1(507,-382) 505,-380 505,-270 ; v1(521,-270) 505,-270
  PWR w5: v1(-78.21,-510) 80.94,-350.85 v1(101,-350.85) ; v1(378.08,-28.95) 378.08,-105.08 521,-248 v1(521,-270)
  Bottom Layer w5: v1(101,-350.85) 103.45,-350.85 166,-288.3 166,-227.66 174.39,-219.28 204.1,-219.28 231.21,-246.38 382.38,-246.38 489,-353 489,-364 v1(507,-382)
SD_CLK: T34.1 U1.P10 | length 780.1
  Top Layer w5: T34.1@250,-550 T34.1@250,-540.64
  Bottom Layer w5: v2(-245.31,-83.43) -245.31,-133.1 17,-395.42 17,-468.41 55.59,-507 182,-507 T34.1@250,-575
SD_CMD: T29.1 U1.R9 | length 681.7
  Bottom Layer w5: v2(-265,-103.11) -265,-135.33 0,-400.33 T29.1@0,-675
SD_D0: T30.1 U1.R11 | length 629.5
  Top Layer w5: U1.R11@-225.63,-103.11 -239.13,-116.61 -239.13,-165.1 -145.73,-258.5 -90.63,-258.5 -52.75,-296.39 -52.75,-472.25 T30.1@50,-575
SD_D1: T31.1 U1.T11 | length 719.4
  Top Layer w5: U1.T11@-225.63,-122.8 -209.76,-138.67 -209.76,-166.19 -137.44,-238.5 -82.35,-238.5 0,-320.85 0,-466.29 100,-566.29 T31.1@100,-675
SD_D2: T32.1 U1.U11 | length 660.2
  Top Layer w5: U1.U11@-225.63,-142.48 -224.29,-143.82 -224.29,-165.8 -141.59,-248.5 -86.49,-248.5 -26.34,-308.65 -26.34,-466.66 v1(24,-517)
  Bottom Layer w5: v1(24,-517) 38.31,-531.31 106.31,-531.31 T32.1@150,-575
SD_D3: T33.1 U1.T12 | length 800.1
  Top Layer w5: U1.T12@-205.94,-122.8 -205.94,-124.69 -199.76,-130.87 -199.76,-162.05 -133.3,-228.5 -78.21,-228.5 24,-330.71 24,-464.16 84.84,-525 165.91,-525 200,-559.09 T33.1@200,-675
SD_DETECT_N: T36.1 U1.R13 | length 867.5
  Top Layer w5: U1.R13@-186.26,-103.11 -185.67,-103.11 -160.39,-128.39 -160.39,-158.91 -120.79,-198.5 -18.2,-198.5 v1(41,-257.7)
  Bottom Layer w5: v1(41,-257.7) 41,-284.05 50,-293.05 50,-468 69,-487 262,-487 T36.1@350,-575
SD_RESET_N: T35.1 U1.T15 | length 832.4
  Bottom Layer w5: v2(-147.01,-122.8) -147.01,-155.99 38.31,-341.31 38.31,-470.45 64.86,-497 227.05,-497 300,-569.95 T35.1@300,-675
SWCLK: J1.4 J2.4 U1.L17 | length 894.9
  Top Layer w5: U1.L17@-107.52,-24.37 -2.13,-24.37 v1(0,-26.5) ; v1(200,-238.51) 200,-178.03 225.58,-152.45 275.61,-152.45 285.94,-162.78 v1(288.62,-162.78) 311.67,-185.83 J2.4@311.67,-269.58
  Bottom Layer w5: v1(0,-26.5) 2.49,-24.01 194.97,-24.01 288.62,-117.67 v1(288.62,-162.78) ; v1(151,-350.85) 200,-301.85 v1(200,-238.51)
SWIO: J1.2 J2.2 U1.L15 | length 698.3
  Top Layer w5: U1.L15@-146.89,-24.37 -127.26,-44 -27.24,-44 -21.09,-50.15 28.22,-50.15 45.7,-67.63 147.57,-67.63 v1(175.9,-95.95) ; J1.2@151,-300.85 249.67,-300.85 261.67,-288.85 J2.2@261.67,-269.58 261.67,-180.62 v1(250,-168.95)
  Bottom Layer w5: v1(175.9,-95.95) 179.03,-95.95 250,-166.92 v1(250,-168.95)
SWO: J1.6 J2.6 U1.L16 | length 941.5
  Top Layer w5: v1(151,-400.85) 154.39,-397.47 196.91,-397.47 221.88,-372.5 v1(221.88,-345.73) ; v1(337.72,-165.5) 361.67,-189.45 v1(361.67,-269.58)
  Bottom Layer w5: v2(-127.2,-24.37) -41.46,-24.37 -27.09,-10 201.84,-10 337.72,-145.88 v1(337.72,-165.5) ; v1(221.88,-345.73) 298.03,-269.58 v1(361.67,-269.58)
TEMP_SENSE: T51.1 U2.14 | length 320.6
  Top Layer w8: U2.14@290,171.93 322.45,171.93 376.36,118.02 v1(392.52,118.02)
  Bottom Layer w8: v1(392.52,118.02) 424.5,150 575,150
VDD_CORE: C26.2 C27.2 C28.2 C29.2 C30.2 C31.2 C32.2 C33.2 C34.2 C35.2 R7.2 U1.C5 U1.D9 U1.F14 U1.J4 U1.J14 U1.P9 U1.R5 U1.R14 | length 2013.5
  Top Layer w10: U1.J4@-363.43,15 v2(-343.74,15) ; U1.D9@-266.07,113.43 U1.D9@-265,113.43 v2(-245.31,113.43) ; v2(-186.26,15) -168.65,15 -168.33,15.32 U1.J14@-168.33,15.68 ; U1.R14@-166.57,-103.11 -166.19,-102.73 -166.19,-101.31 -166,-101.12 v2(-166,-84) ; R7.2@130.31,453.11 R7.2@130.31,455.08 ; v1(131.28,453.26) 131.28,435.03 v1(131.98,435.03) ; v1@131.67,468.35 131.98,468.04 R7.2@131.98,453.93 ; R7.2@131.98,453.32 R7.2@131.98,453.93 ; R7.2@132,453.34 132.28,453.62 R7.2@131.98,453.93
  PWR w10: -408.02,380.84 -412.63,376.23 -412.63,285.86 -408.02,281.25 -408.02,190.88 ; v2(-343.74,-103.11) -291.57,-103.11 -272.27,-83.81 -265.38,-83.81 v2(-265,-83.43) -265,-48.98 ; v2(-343.74,133.11) -343.74,156.73 ; -268.02,240.84 -147.64,361.22 177.17,361.22 ; v2(-245.31,113.43) -245.31,142.95 -259.09,156.73 -343.74,156.73 ; v2(-166.57,74.06) -166.57,20.86 -172.43,15 v2(-186.26,15) -203.98,15 -228.58,-9.61 -228.58,-40.12 -229.57,-41.1 ; v2(-166,-84) -165.94,-83.94 -165.94,-72.25 -176.42,-61.77 -208.9,-61.77 -229.57,-41.1 ; -408.02,190.88 -404,186.87 -404,183.32 -377.42,156.73 -343.74,156.73 ; -408.02,190.88 -432.32,166.57 -432.32,57.32 -390,15 v2(-343.74,15) -328.98,15 -265,-48.98 ; -265,-48.98 -257.13,-41.1 -229.57,-41.1
  Bottom Layer w10: C30.2@-363.92,15 -363.84,15.08 -355.87,15.08 -355.56,15.38 -344.12,15.38 v2(-343.74,15) -342.66,15 -341.66,16 C29.2@-324,16 ; C33.2@-344.72,134.64 -343.74,133.65 v2(-343.74,133.11) ; C33.2@-344.29,134.79 -344.21,134.71 C33.2@-344.01,134.71 ; C32.2@-344.01,-84 -344.09,-84.08 -343.87,-84.08 -343.87,-102.98 v2(-343.74,-103.11) v2@-343.74,-102.57 ; v2(-265,-83.43) C27.2@-265,-63.74 ; C34.2@-264,111 C34.2@-264,111 -249.71,110.92 -247.59,113.04 -245.7,113.04 v2(-245.31,113.43) ; C28.2@-207,16 -206,15 v2(-186.26,15) ; v2(-166.57,74.06) -131.94,74.06 C26.2@-131,75 C35.2@-131,47 ; v2(-166,-84) -166,-84.54 -165.4,-85.14 C31.2@-165.4,-105.08
  other v1: 131.67,471.35
VDDIO0: U1.F5 U1.H5 U1.K5 U1.M5 U1.N6 U1.N8 U1.N10
pads on no net: F1.1 F2.1 F3.1 F4.1 F5.1 F6.1 F7.1 F8.1 J1.A J1.B J1.C J2.7 J2.8 J2.A T77.1 T78.1 T79.1 T80.1 T81.1 T82.1 T83.1 T84.1 T85.1 T86.1 T88.1 T92.1 U1.A7 U1.B2 U1.C1 U1.E2 U1.F4 U1.G3 U1.G15 U1.J15 U1.M14 U1.N15 U1.T1 U1.T3 U1.T16 U1.U16 U1.U17 U3.1 U6.A2 U6.A5 U6.B1 U6.B5 U6.C5

## Polygon pours and split planes (outlines as drawn)
+3v3 on PWR "+3V3_L03_P003" (solid, remove dead copper, pour order 3): -874.25,-788 779,-788 779,769 -874.25,769
VDD_CORE on PWR "VDD_CORE_L03_P002" (solid, remove dead copper, pour order 2): -366.38,-125.75 -366.38,3.19 -472.68,3.19 -472.68,483 182.83,483 182.83,355 -150.83,355 -150.83,212.83 -150.83,-124.76
GND on GND "GND_L02_P000" (solid, remove dead copper, pour order 0): -1118.35,896.89 -1118.35,-916.1 840,-916.1 840,896.89
GND on Bottom Layer "GND_L04_P004" (solid, remove dead copper, pour order 4): -859,860 -859,-932 779,-932 779,860

## Keep-outs
Keep-Out Layer:
  lines w1: -705,-534 -705,-466 -609,-466 -609,-434 -705,-434 -705,-366 -609,-366 -609,-334 -705,-334 -705,-266 -609,-266 -609,-234 -705,-234 -705,-166 -609,-166 -609,-134 -705,-134 -705,-66 -609,-66 -609,-34 -705,-34 -705,34 -609,34 -609,66 -705,66 -705,134 -609,134 -609,166 -705,166 -705,234 -609,234 -609,266 -705,266 -705,334 -609,334 -609,366 -705,366 -705,434 -609,434 -609,466 -705,466 -705,534 -674.96,534 -674.96,553.16 cw(c-650,650) -553.16,674.96 -534,674.96 -534,705 -466,705 -466,609 -434,609 -434,705 -366,705 -366,609 -334,609 -334,705 -266,705 -266,609 -234,609 -234,705 -166,705 -166,609 -134,609 -134,705 -66,705 -66,609 -34,609 -34,705 34,705 34,609 66,609 66,705 134,705 134,609 166,609 166,705 234,705 234,609 266,609 266,705 334,705 334,609 366,609 366,705 434,705 434,609 466,609 466,705 534,705 534,675 553.16,675 553.16,674.96 cw(c650,650) 674.96,553.16 674.96,534 705,534 705,466 609,466 609,434 705,434 705,366 609,366 609,334 705,334 705,266 609,266 609,234 705,234 705,166 609,166 609,134 705,134 705,66 609,66 609,34 705,34 705,-34 609,-34 609,-66 705,-66 705,-134 609,-134 609,-166 705,-166 705,-234 609,-234 609,-266 705,-266 705,-334 609,-334 609,-366 705,-366 705,-434 609,-434 609,-466 705,-466 705,-534 675,-534 675,-553.16 674.96,-553.16 cw(c650,-650) 553.16,-674.96 553.16,-675 534,-675 534,-705 466,-705 466,-609 434,-609 434,-705 366,-705 366,-609 334,-609 334,-705 266,-705 266,-609 234,-609 234,-705 166,-705 166,-609 134,-609 134,-705 66,-705 66,-609 34,-609 34,-705 -34,-705 -34,-609 -66,-609 -66,-705 -134,-705 -134,-609 -166,-609 -166,-705 -234,-705 -234,-609 -266,-609 -266,-705 -334,-705 -334,-609 -366,-609 -366,-705 -434,-705 -434,-609 -466,-609 -466,-705 -534,-705 -534,-675 -553.16,-675 -553.16,-674.96 cw(c-650,-650) -674.96,-553.16 -674.96,-534 -705,-534

## Silkscreen, mask and mechanical layers (free items; w line width, h text height)
Top Overlay:
  text "59" at 377,607 h50
  text "76" at -476,507 h50
  text "58" at 425,507 h50
  text "1" at -537,434 h50
  text "2" at -637,384 h50
  text "40" at 591,-416 h50
  text "39" at 493,-465 h50
  text "20" at -472,-538 h50
  text "21" at -421,-639 h50
Bottom Overlay:
  text "W" at -1421,1123 h300
  text "Super Monkey" at -39,390 h125
  text "RT685 Audio Platorm" at -21.17,305.5 h75
  text "M" at 491,99 h700
  text "REV C" at 356,-33 h175
  text "2022-01-06" at -108,-438 h80
[8] Board Outline:
  drawing of 303 lines, arcs and shapes, not listed